# Altium PCB High Speed Sample.PcbDoc
Units mm, origin at the board's own origin, x right, y up, seen from the top; angles counter-clockwise.
Board outline 60 x 40 mm, 4 copper layers (Top Layer, Mid Layer 1, Mid Layer 2, Bottom Layer), stack 1.57 mm thick; 2 components, 181 nets, 16 pads, 0 vias.
Unrouted connection lines stored in the file: 1.
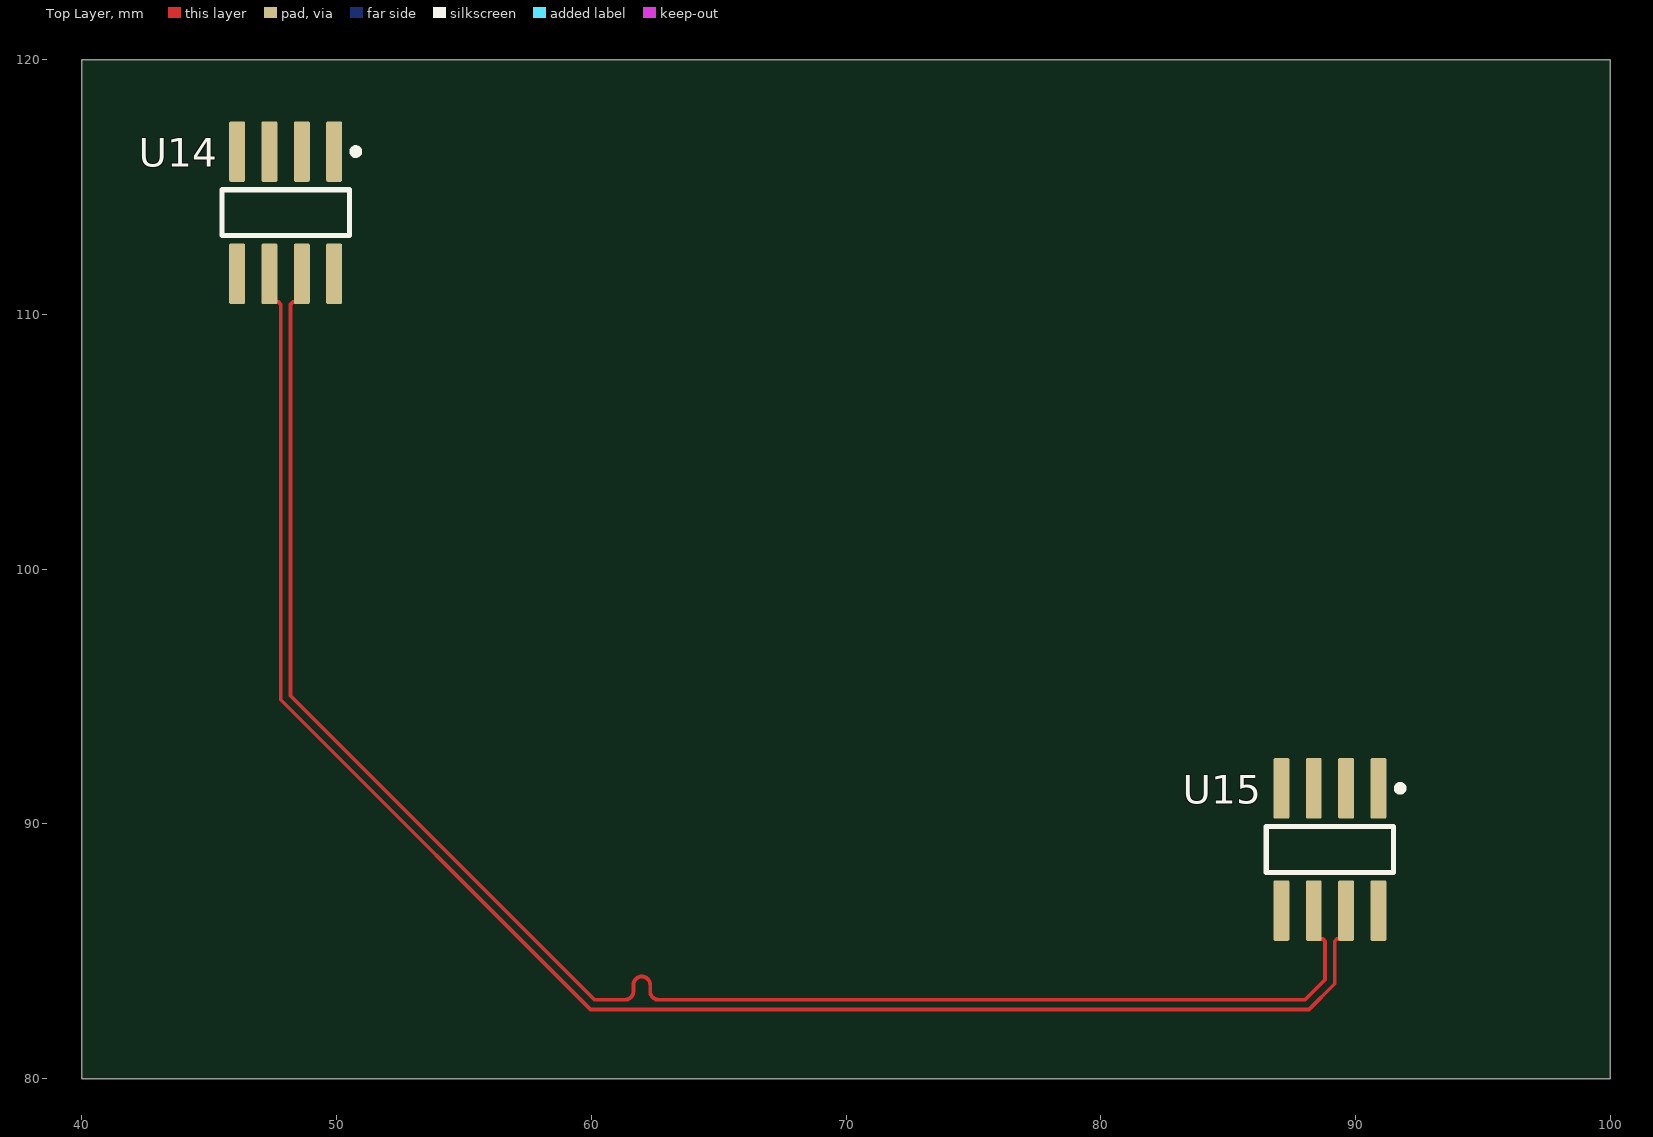
[diagram p0: Top Layer view]
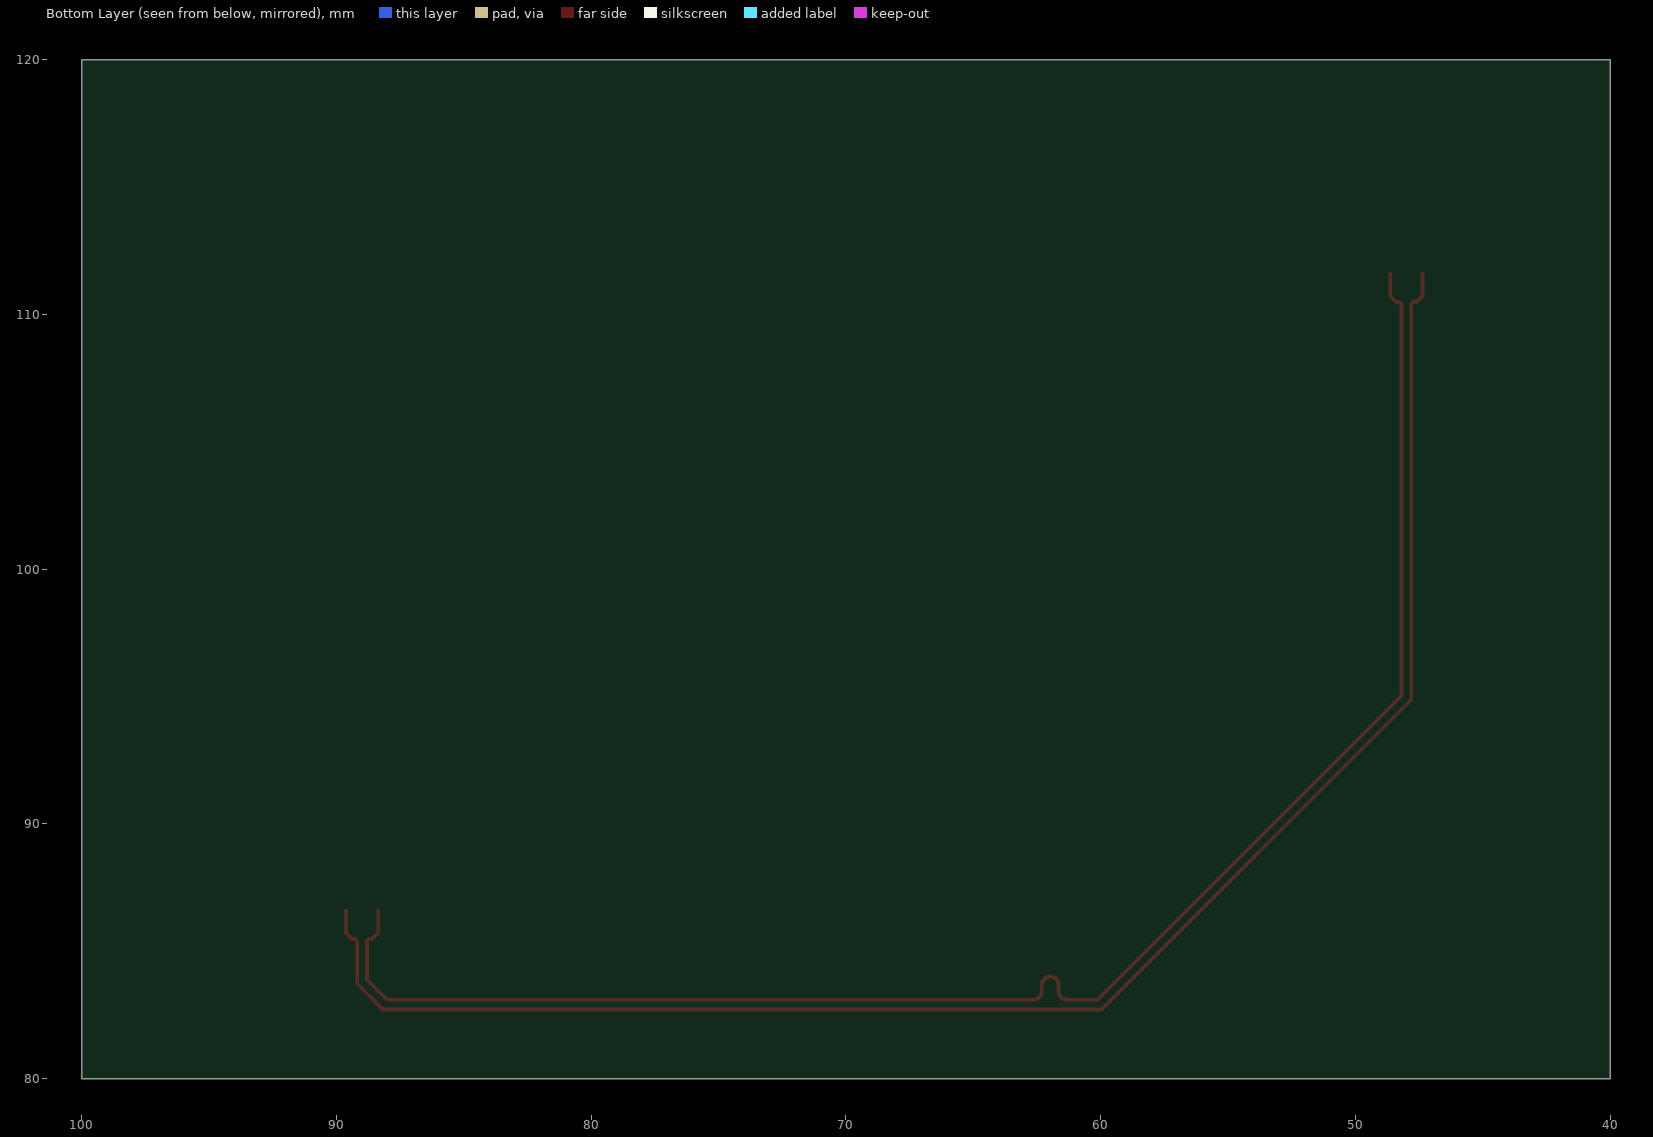
[diagram p1: Bottom Layer view, seen from below]

## Layer stack, top to bottom
Top Solder: solder mask 0.0127, Solder Resist, Dk 3.8
Top Layer: signal copper 0.035
Dielectric 1: prepreg 0.2, 7628, Dk 4.6
Mid Layer 1: signal copper 0.0175
Core: core 1.065, FR-4, Dk 4.5
Mid Layer 2: signal copper 0.0175
Dielectric 2: prepreg 0.2, 7628, Dk 4.6
Bottom Layer: signal copper 0.035
Bottom Solder: solder mask 0.0127, Solder Resist, Dk 3.8

## Board outline
40,80 40,120 100,120 100,80

## Design rules (kind name [scope] priority, off if disabled: settings)
Clearance [All] p1: gap=0.254 ignorepadtopadclearanceinfootprint=FALSE except(0: Arc-Hole Track-Hole SMDPad-Hole THPad-Hole Via-Hole Fill-Hole Poly-Hole Region-Hole Text-Hole)
DiffPairsRouting [InDifferentialPairClass('CAN120')] p1: maxlimit=0.254 minlimit=0.23 mostfreqgap=0.254 toplayer_maxgap=0.23 toplayer_prefgap=0.23 toplayer_minwidth=0.15 toplayer_maxwidth=0.15 toplayer_prefwidth=0.15 bottomlayer_maxgap=0.23 bottomlayer_prefgap=0.23 bottomlayer_minwidth=0.15 bottomlayer_maxwidth=0.15 bottomlayer_prefwidth=0.15 impedanceprofiledriven=TRUE impedanceprofileid={DE1865BE-DAE5-461E-B137-7C93CD832A5B} impedanceprofilevalue=120.000000 maxuncoupledlength=12.7
MatchedLengths [InDifferentialPairClass('CAN120')] p1: tolerance=0.1 checknetsindiffpair=TRUE checkdiffpairvsdiffpair=FALSE checkxsignals=FALSE checkothers=FALSE
PolygonConnect [All] p1: connectstyle=Relief reliefconductorwidth=0.254 reliefentries=4 polygonreliefangle="90 Angle" airgapwidth=0.254
RoutingVias [All] p1: holewidth=0.711 width=1.27 viastyle="Through Hole" minholewidth=0.711 minwidth=1.27 maxholewidth=0.711 maxwidth=1.27
SolderMaskExpansion [All] p1: expansion=0.102 istentingtop=FALSE
Width [All] p1: maxlimit=0.254 minlimit=0.254 preferedwidth=0.254
29 further rules are at their usual default settings.

## Classes and differential pairs
differential pair class CAN120: CANB
differential pair USB: +USB_P -USB_N
differential pair RS-485: +RS-485_P -RS-485_N
differential pair CANB: +CANB_P -CANB_N
differential pair CANA: +CANA_P -CANA_N

## Components (designator, comment, footprint, x,y, rotation, side; value= is the part's Value field where it differs from the comment)
U14 "LTC2875" LT-S8_N 48,114 r270 top
U15 "LTC2875" LT-S8_N 89,89 r270 top

## Footprints (in the part's own frame and the unit in brackets; to place one, negate y for a bottom-side part, rotate by r counter-clockwise, add the part's x,y. Pads: shape width x height; smd on the part's side, far side on the other; paste and mask are expansions set on the pad)
LT-S8_N [mm] "SOP, 8-Leads, Body 4.9x3.9mm, Pitch 1.27mm, IPC Medium Density"
  rrect20% 2.375x0.625 smd: 1(-2.4,1.905) 2(-2.4,0.635) 3(-2.4,-0.635) 4(-2.4,-1.905) 5(2.4,-1.905) 6(2.4,-0.635) 7(2.4,0.635) 8(2.4,1.905)
  silkscreen extent -2.52,-2.5 0.9,2.88, body extent -2.91,-2.4 2.87,2.5, height 1.45

## Part data
U14: "IC TXRX CAN 4MBPS 8SO", LCSC Part #=C117076, Manufacturer 1="Linear Technologies", Manufacturer Part Number 1=LTC2875IS8#PBF, Package/Footprint=8-SOIC, Supplier Part Number 1=LTC2875IS8#PBF-ND, Mounting Type=SMD, Supplier 1=Digi-Key
U15: library part BTS5014SDAAUMA1, "IC PWR SWITCH N-CHAN 1:1 TO252-5", LCSC Part #=C117076, Manufacturer 1="Linear Technologies", Manufacturer Part Number 1=LTC2875IS8#PBF, Package/Footprint=8-SOIC, Supplier Part Number 1=LTC2875IS8#PBF-ND, Mounting Type=SMD, Supplier 1=Digi-Key

## Nets (pads, with @x,y where several pads share a name; then routed paths per layer and width w, separated by ;. In a path a pad name is that pad's centre, name@x,y a point inside that pad or via, vN(x,y) a via of type N, cw(c..) or ccw(c..) an arc to the next point about the centre after c; other vN are vias at no path point)
3V3: U14.3
5V: 
5V_FB: 
5V_LOAD1: 
5V_LOAD2: 
5V_LOAD3: 
5V_LOAD4: 
5V_RT: 
5V_VCC: 
17V: U15.3
17V_FB: 
17V_LOAD: U15.1 U15.5
17V_VCC: 
ADJ: 
AGND: U14.2
CANA_N: 
CANA_P: 
CANB_N: U14.6 U15.7 | length 66.9
  Top Layer w0.15: U14.6 47.365,110.725 47.603,110.488 47.722,110.488 47.81,110.4 47.81,94.878 59.968,82.72 88.182,82.72 89.19,83.728 89.19,85.4 89.278,85.487 89.397,85.487 89.635,85.725 U15.7
CANB_P: U14.7 U15.6 | length 66.9
  Top Layer w0.15: U14.7 48.635,110.725 48.398,110.488 48.278,110.488 48.19,110.4 48.19,95.035 60.125,83.1 61.326,83.1 ccw(c61.326,83.429) 61.655,83.429 61.655,83.683 cw(c61.984,83.683) 61.984,84.012 cw(c61.984,83.683) 62.313,83.683 62.313,83.429 ccw(c62.642,83.429) 62.642,83.1 63.375,83.1 88.025,83.1 88.81,83.885 88.81,85.4 88.722,85.487 88.602,85.487 88.365,85.725 U15.6
COMP: 
CS: 
CSG: 
EN_5V: 
EN_17V: 
HB: 
HO: 
ISEN: 
JTDI: 
JTDO/TRACESWO: 
LED_B_n: 
LED_G_n: 
LED_MATRIX_B_PWM: 
LED_MATRIX_G_PWM: 
LED_MATRIX_R_PWM: 
LED_R_n: 
LO: 
NetBZ1_2: 
NetC2_1: 
NetC2_2: 
NetC3_1: 
NetC3_2: 
NetC4_1: 
NetC4_2: 
NetC5_1: 
NetC5_2: 
NetC6_1: 
NetC6_2: 
NetC8_1: 
NetC8_2: 
NetC9_1: 
NetC9_2: 
NetC10_1: 
NetC10_2: 
NetC11_1: 
NetC11_2: 
NetC12_2: 
NetC13_1: 
NetC13_2: 
NetC14_1: 
NetC14_2: 
NetC56_2: 
NetC57_2: 
NetC59_2: 
NetC71_1: 
NetD2_1: 
NetD2_3: 
NetD3_1: 
NetD9_2: 
NetD10_1: 
NetD11_1: 
NetD13_1: 
NetD14_1: 
NetD14_2: 
NetD14_3: 
NetD16_1: 
NetD17_1: 
NetD19_1: 
NetD20_1: 
NetF2_1: 
NetF3_1: 
NetF4_1: 
NetF5_1: 
NetH1_1: 
NetH2_1: 
NetH3_2: 
NetJ2_2: 
NetJ2_3: 
NetJ2_4: 
NetJ2_5: 
NetJ2_6: 
NetJ2_9: 
NetJ2_10: 
NetJ2_11: 
NetJ2_12: 
NetJ2_13: 
NetJ2_14: 
NetQ3_1: 
NetQ3_3: U15.2
NetQ4_1: 
NetQ4_3: 
NetQ5_1: 
NetQ5_3: 
NetQ6_1: 
NetQ6_3: 
NetQ7_1: 
NetQ8_1: 
NetQ8_2: 
NetQ9_1: 
NetQ9_3: 
NetQ10_1: 
NetQ10_3: 
NetQ11_1: 
NetQ11_3: 
NetQ12_1: 
NetQ12_3: 
NetQ13_1: 
NetQ13_3: 
NetQ14_1: 
NetQ14_3: 
NetQ15_1: 
NetQ15_3: 
NetQ16_1: 
NetQ16_3: 
NetQ17_1: 
NetR2_2: 
NetR3_2: 
NetR6_2: 
NetR7_2: 
NetR10_2: 
NetR11_2: 
NetR20_2: 
NetR21_1: 
NetR23_1: 
NetR24_2: 
NetR28_2: 
NetR29_1: 
NetR30_1: 
NetR31_1: 
NetR32_2: 
NetR33_1: 
NetR36_2: 
NetR39_2: 
NetR70_1: 
NetR73_1: 
NetR75_1: U14.8
NetR77_2: U15.4
NetR94_1: 
NetTP13_1: 
NetTP14_1: 
NetTP19_1: 
NetU1_1: 
NetU2_1: 
NetU2_2: 
NetU2_3: 
NetU2_4: 
NetU2_80: 
NetU6_4: 
NetU7_4: 
NetU8_4: 
NetU10_4: 
NetU11_33: U14.4
NetU11_34: U14.1
NetU11_37: 
NetU11_44: 
NetU11_45: 
NetU16_2: 
NRST: 
PGATE: 
RAMP: 
RES: 
RS-485_N: 
RS-485_P: 
SS: 
SW: 
SWD_CLK: 
SWD_IO: 
TEMPERATURE_ADC_INPUT: 
USB_N: 
USB_P: 
VBAT: 
VBAT_FUSED: 
pads on no net: U14.5 U15.8

## Silkscreen, mask and mechanical layers (free items; w line width, h text height)
Mechanical 1:
  the board outline again, w0.254